# Altium PCB mySparky.PcbDoc
Units mil, origin at the board's own origin, x right, y up, seen from the top; angles counter-clockwise.
Board outline 1062.99 x 866.14 mil, 4 copper layers (Top Layer, GND, PWR, Bottom Layer), stack 30.634 mil thick; 48 components, 48 nets, 231 pads, 95 vias.
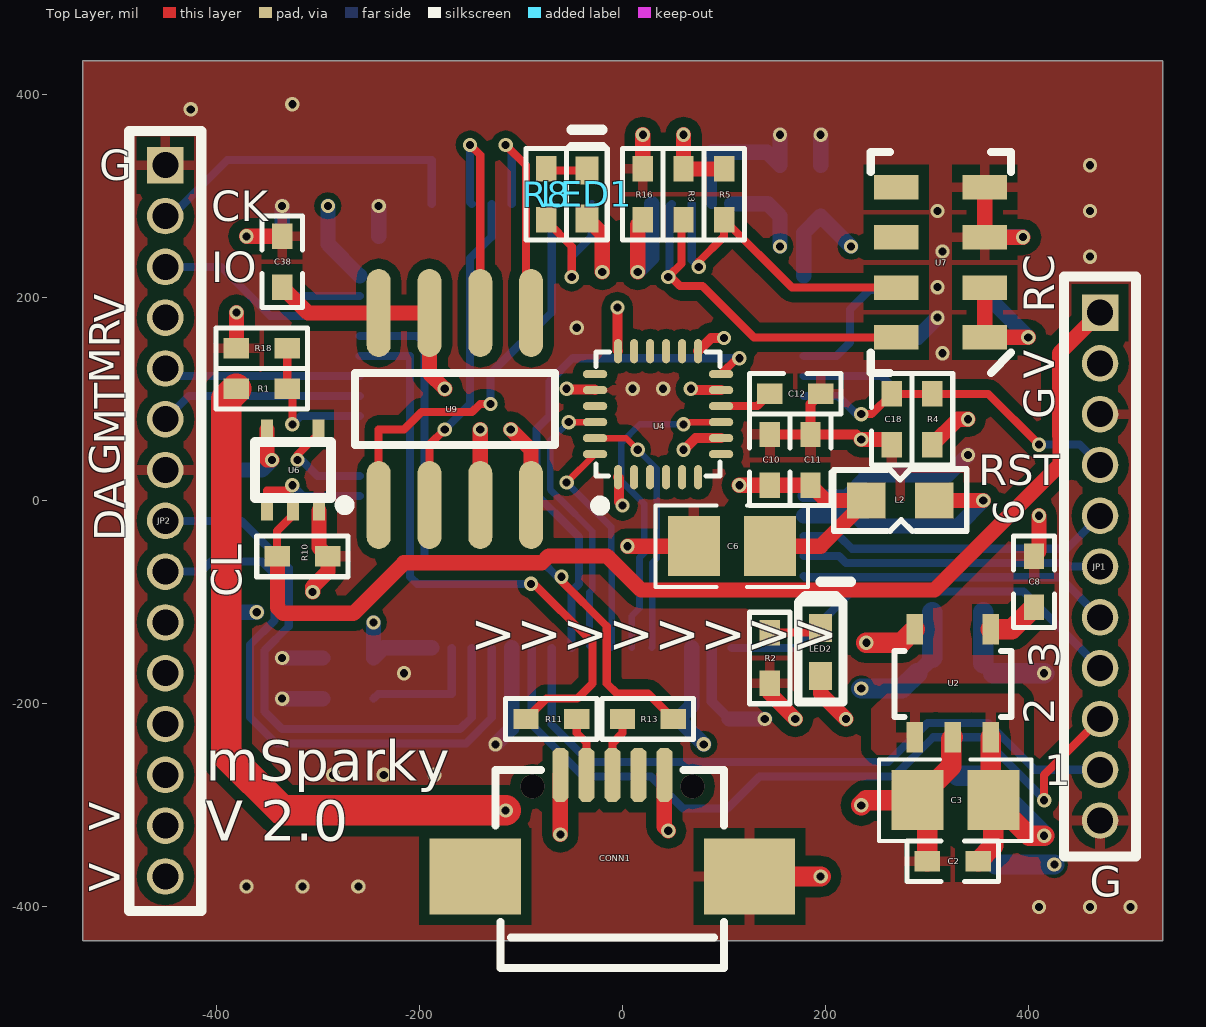
[diagram p0: Top Layer view]
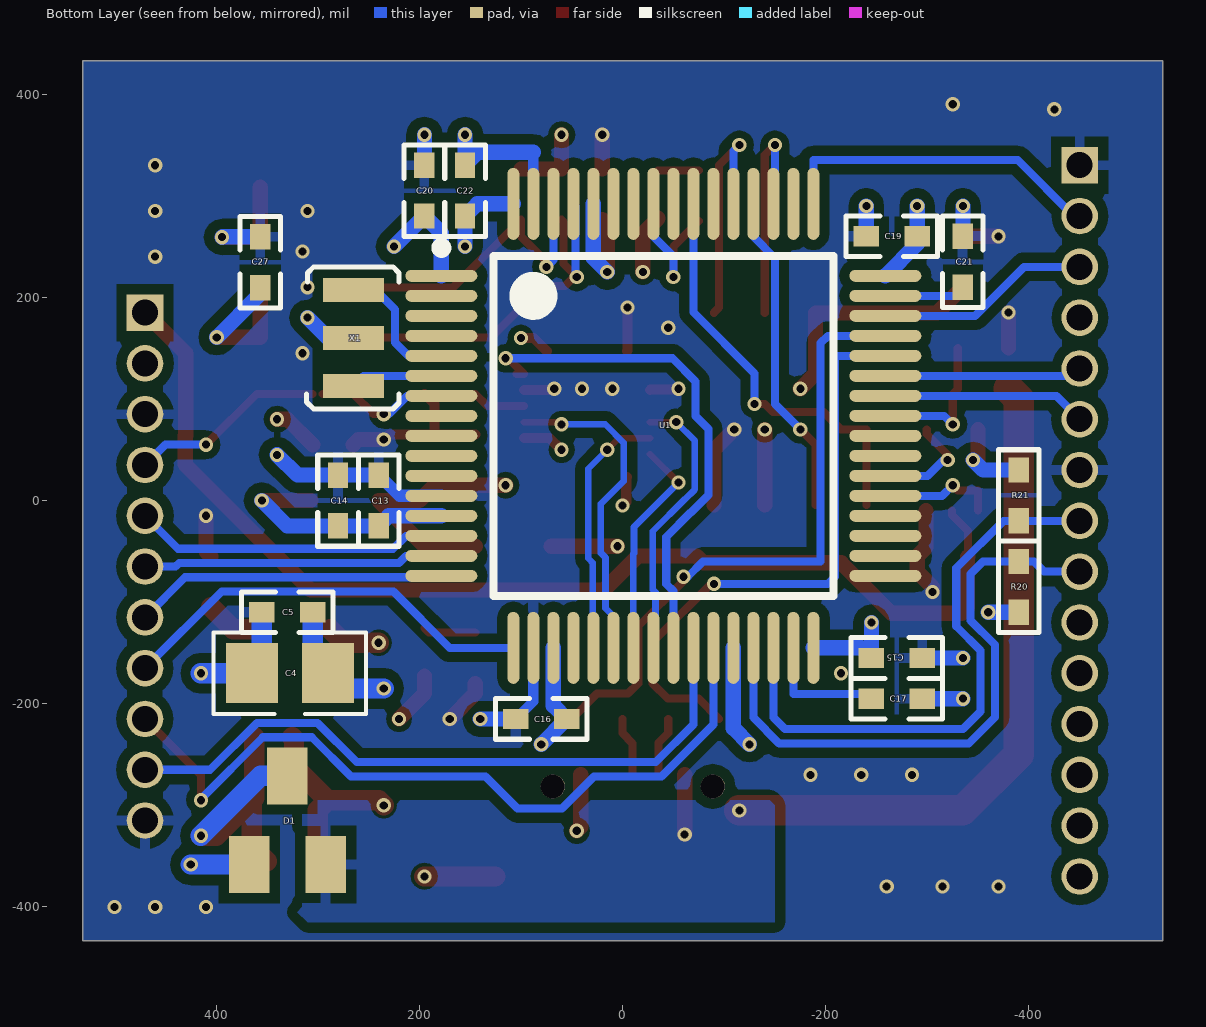
[diagram p1: Bottom Layer view, seen from below]
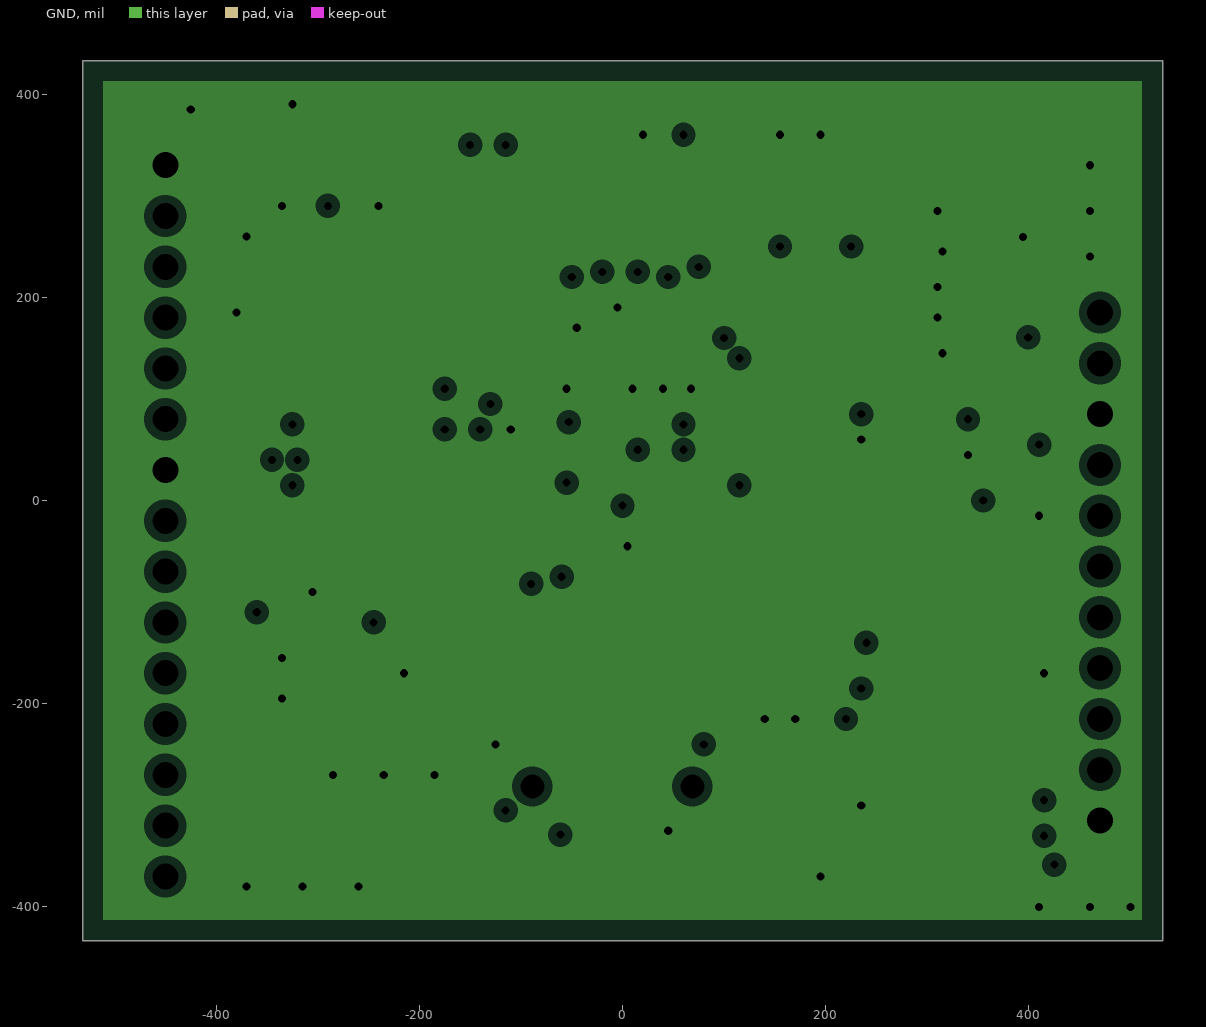
[diagram p2: GND, clearances drawn from the general rule]
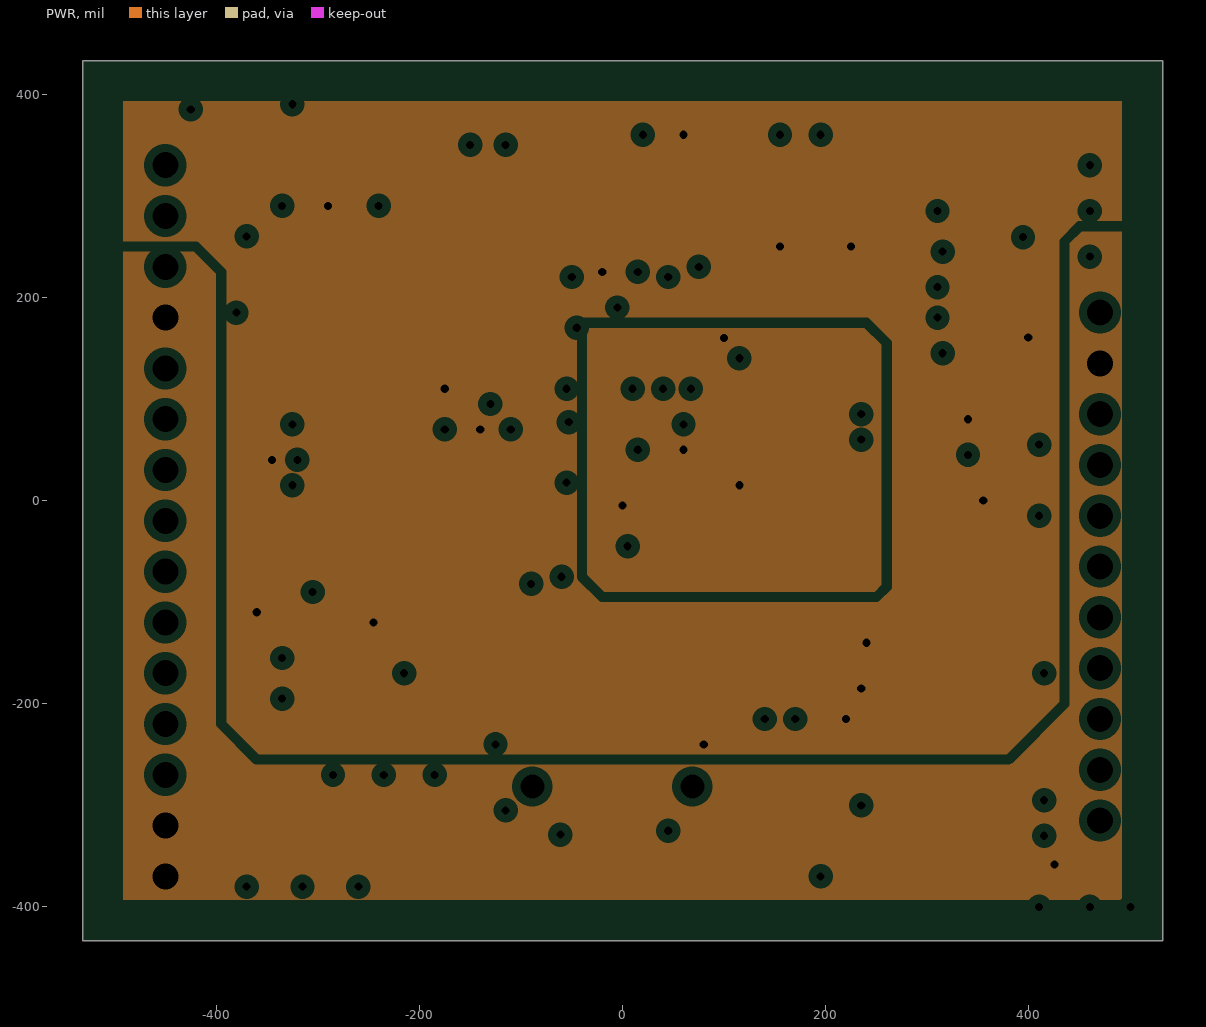
[diagram p3: PWR, clearances drawn from the general rule]

## Layer stack, top to bottom
Top Solder: solder mask 0.4, Solder Resist, Dk 3.5
Top Layer: signal copper 1.4
Dielectric 1: core 10, FR-4, Dk 4.2
GND: plane copper 1.417, net GND
Dielectric 3: prepreg 5, Dk 4.2
PWR: plane copper 1.417, net (Multiple Nets)
Dielectric 2: core 10, Dk 4.2
Bottom Layer: signal copper 1.4
Bottom Solder: solder mask 0.4, Solder Resist, Dk 3.5

## Board outline
-531.5,-433.07 -531.5,433.07 531.5,433.07 531.5,-433.07

## Design rules (kind name [scope] priority, off if disabled: settings)
Clearance [All] p1: gap=6 ignorepadtopadclearanceinfootprint=FALSE except(10: Arc-Fill Arc-Poly Arc-Region Track-Fill Track-Poly Track-Region SMDPad-Fill SMDPad-Poly SMDPad-Region THPad-Fill THPad-Poly THPad-Region Fill-Fill Fill-Poly Fill-Region Poly-Poly Poly-Region Region-Region)
DiffPairsRouting [All] p1: maxlimit=10 minlimit=6 mostfreqgap=6 toplayer_minwidth=6 toplayer_maxwidth=12 toplayer_prefwidth=6 bottomlayer_minwidth=6 bottomlayer_maxwidth=12 bottomlayer_prefwidth=6 maxuncoupledlength=500
PlaneClearance [All] p1: clearance=8
PlaneConnect [All] p1: pad.planeconnectstyle=Relief pad.reliefexpansion=10 pad.reliefentries=4 pad.reliefconductorwidth=6 pad.reliefairgap=8 via.planeconnectstyle=Direct via.reliefexpansion=20 via.reliefentries=4 via.reliefconductorwidth=10 via.reliefairgap=10
PolygonConnect [All] p1: thpad.connectstyle=Relief thpad.reliefconductorwidth=10 thpad.reliefentries=4 thpad.polygonreliefangle="90 Angle" thpad.airgapwidth=10 smdpad.connectstyle=Relief smdpad.reliefconductorwidth=10 smdpad.reliefentries=4 smdpad.polygonreliefangle="90 Angle" smdpad.airgapwidth=10 via.connectstyle=Direct via.reliefconductorwidth=10 via.reliefentries=4 via.polygonreliefangle="90 Angle" via.airgapwidth=10
RoomDefinition IMU [InComponentClass('IMU')] p1: confinementstyle=ConfineIn formatcopy=TRUE lockcomponents=FALSE outline -3880,-3030 -1880,-3030 -1880,-2030 -3880,-2030
RoomDefinition connector [InComponentClass('connector')] p2: confinementstyle=ConfineIn formatcopy=TRUE lockcomponents=FALSE outline -3880,-3030 -1880,-3030 -1880,-2030 -3880,-2030
RoutingVias [All] p1: holewidth=8 width=14 viastyle="Through Hole" minholewidth=8 minwidth=14 maxholewidth=8 maxwidth=14
SolderMaskExpansion [All] p1: expansion=2.5
UnRoutedNet [All] p1: checkbadconnections=TRUE
Width PWR [InNetClass('PWR')] p1: maxlimit=30 minlimit=10 preferedwidth=15
Width [All] p2: maxlimit=30 minlimit=6 preferedwidth=6.5
26 further rules are at their usual default settings.

## Classes and differential pairs
component class mcu: C2 C3 C4 C5 C6 C8 C13 C14 C15 C16 C17 C18 C19 C20 C21 C22 C27 C38 CONN1 D1 L2 LED1 LED2 R1 R2 R3 R4 R5 R8 R10 R11 R13 R16 R18 R20 R21 U1 U2 U6 U7 U9 X1
component class IMU: C10 C11 C12 U4
component class connector: JP1 JP2

## Components (designator, comment, footprint, x,y, rotation, side; value= is the part's Value field where it differs from the comment)
C2 "10nF" 0402C 325,-355 r0 top
C3 "10uF" 0805-1 327.6,-295 r0 top
C4 "10uF" 0805-1 327.4,-170 r180 bottom
C5 "10nF" 0402C 330,-110 r180 bottom
C6 "10uF" 0805-1 107.6,-45 r0 top
C8 "10nF" 0402C 405,-80 r270 top
C10 "10nF" 0402C 145,40 r90 top
C11 "100nF" 0402C 185,40 r90 top
C12 "100nF" 0402C 170,105 r180 top
C13 "10nF" 0402C 240,0 r90 bottom
C14 "100nF" 0402C 280,0 r90 bottom
C15 "100nF" 0402C -270,-155 r0 bottom
C16 "100nF" 0402C 80,-215 r0 bottom
C17 "2.2uF" 0402C -270,-195 r0 bottom
C18 "100nF" 0402C 265,80 r90 top
C19 "100nF" 0402C -265,260 r180 bottom
C20 "100nF" 0402C 195,305 r270 bottom
C21 "2.2uF" 0402C -335,235 r90 bottom
C22 "100nF" 0402C 155,305 r90 bottom
C27 "100nF" 0402C 356.61,234.61 r270 bottom
C38 "100nF" 0402C -335,235 r90 top
CONN1 "USB" USB_MIC_h -10,-370 r0 top locked
D1 "BAT54C" SOT23 330,-315 r180 bottom
JP1 "pad" 1.27*11 470,-65 r0 top
JP2 "pad" 1.27*15 -450,-20 r0 top
L2 "1uH" L0603 278.87,0 r180 top
LED1 "LED-B" "0402LED B" -35,301.38 r90 top
LED2 "LED_GREEN_PWR" "0402LED G" 195,-149.17 r90 top
R1 "10K" 0402R -355,110 r0 top
R2 "330R" 0402R 145,-155 r270 top
R3 "10K" 0402R 60,301.38 r90 top
R4 "10K" 0402R 305,80 r270 top
R5 "10K" 0402R 100,301.38 r90 top
R8 "330R" 0402R -75,301.38 r90 top
R10 "10K" 0402R -315,-55 r180 top
R11 "22R" 0402R -70,-215 r0 top
R13 "22R" 0402R 25,-215 r180 top
R16 "10K" 0402R 20,301.38 r90 top
R18 "10K" 0402R -355,150 r0 top
R20 "10K" 0402R -390,-85 r90 bottom
R21 "10K" 0402R -390,5 r270 bottom
U1 "STM32F405RGT6" STM-LQFP64_N -40.16,73.5 r180 bottom
U2 "LP2992-3.3" SOT-23-5L 325,-180 r90 top
U4 "MPU9250" QFN24-0.4 35,85 r90 top
U6 "XOR" SC70-5 -324.41,30 r0 top
U7 "MS5611" MS5611-01BA 313.31,234.61 r180 top
U9 "Flash 16Mbits" SO8_N -165,90 r90 top
X1 "8MHz" XTAL3215 265,160 r90 bottom

## Footprints (in the part's own frame and the unit in brackets; to place one, negate y for a bottom-side part, rotate by r counter-clockwise, add the part's x,y. Pads: shape width x height; smd on the part's side, far side on the other; paste and mask are expansions set on the pad)
1.27*11 [mil]
  rect 36x36 hole 25.59 mask+1.18: 1(0,250)
  round 36 hole 25.59 mask+1.18: 2(0,200) 3(0,150) 4(0,100) 5(0,50) 6(0,0) 7(0,-50) 8(0,-100) 9(0,-150) 10(0,-200) 11(0,-250)
  silkscreen extent -35,-285 35,285
1.27*15 [mil]
  rect 36x36 hole 25.59 mask+1.18: 1(0,350)
  round 36 hole 25.59 mask+1.18: 2(0,300) 3(0,250) 4(0,200) 5(0,150) 6(0,100) 7(0,50) 8(0,0) 9(0,-50) 10(0,-100) 11(0,-150) 12(0,-200) 13(0,-250) 14(0,-300) 15(0,-350)
  silkscreen extent -35,-384 35,384
0402C [mil]
  rect 25x20 smd: 1(-25,0) 2(25,0)
  silkscreen extent -45,-20 45,20
"0402LED B" [mm]
  rect 0.7x0.58 smd: 1(-0.6,0) 2(0.6,0)
  silkscreen extent -1.14,-0.51 1.24,0.51, body extent -0.5,-0.25 0.51,0.25, height 0.45
"0402LED G" [mm]
  rect 0.7x0.58 smd: 1(-0.6,0) 2(0.6,0)
  silkscreen extent -1.24,-0.56 1.42,0.56, body extent -0.5,-0.25 0.51,0.25, height 0.45
0402R [mil]
  rect 25x20 smd: 1(-25,0) 2(25,0)
  silkscreen extent -45,-20 45,20
0805-1 [mm] "贴片带丝印"
  rect 1.3x1.5 smd: 1(-0.95,0) 2(0.95,0)
  silkscreen extent -1.91,-1.02 1.91,1.02, body extent -1.14,-0.51 1.14,0.51, height 1
L0603 [mil]
  rect 38x35 smd: 1(-28,0) 2(38.87,0)
  silkscreen extent -60,-31 71,30, body extent -24,-15 36,15, height 20
MS5611-01BA [mil] "MS5611-01BA"
  rect 44x24 smd: 1(-43.31,74) 2(-43.31,25) 3(-43.31,-24.61) 4(-43.31,-73.82) 5(44,-73.82) 6(44,-24.61) 7(44,25) 8(44,74)
  silkscreen extent -69,-108 69,109, body extent -59,-98 59,99, height 39
QFN24-0.4 [mil]
  oval 24x8 smd: 1(-62.01,39.37) 2(-62.01,23.62) 3(-62.01,7.87) 4(-62.01,-7.87) 5(-62.01,-23.62) 6(-62.01,-39.37) 13(62.01,-39.37) 14(62.01,-23.62) 15(62.01,-7.87) 16(62.01,7.87) 17(62.01,23.62) 18(62.01,39.37)
  oval 8x24 smd: 7(-39.37,-62.01) 8(-23.62,-62.01) 9(-7.87,-62.01) 10(7.87,-62.01) 11(23.62,-62.01) 12(39.37,-62.01) 19(39.37,62.01) 20(23.62,62.01) 21(7.87,62.01) 22(-7.87,62.01) 23(-23.62,62.01) 24(-39.37,62.01)
  silkscreen extent -95,-61 61,62
SC70-5 [mm]
  rect 0.3x0.5 smd: 1(-0.65,-1.016) 2(0,-1.016) 3(0.65,-1.016) 4(0.635,1.016) 5(-0.65,1.016)
  round 0.3 on Top Overlay: 6(-0.635,-0.381)
  silkscreen extent -0.95,-0.7 0.95,0.7
SO8_N [mm] "SOIC, 8-Leads, Body 4.9x3.9mm, Pitch 1.27mm, IPC Medium Density"
  oval 2.2x0.6 smd: 1(-2.4,1.905) 2(-2.4,0.635) 3(-2.4,-0.635) 4(-2.4,-1.905) 5(2.4,-1.905) 6(2.4,-0.635) 7(2.4,0.635) 8(2.4,1.905)
  silkscreen extent -2.52,-2.5 0.9,2.88, body extent -2,-2.5 2,2.5, height 1.75
SOT23 [mil] "SOT23"
  rect 40x56 smd: 1(-37.4,-43.31) 2(38,-43.31) 3(0,44)
  body extent -57,-50 57,60, height 51
SOT-23-5L [mm]
  rect 0.762x0.406 smd: 1(-1.35,0.95) 2(-1.35,0) 3(-1.35,-0.95) 4(1.35,-0.95) 5(1.35,0.95)
  round 0.3 on Top Overlay: 7(-0.525,1.175)
  silkscreen extent -0.84,-1.46 0.81,1.46
STM-LQFP64_N [mm] "Thin QFP, 64-Leads, Body 10x10mm, Pitch 0.5mm, IPC Medium Density"
  oval 1.8x0.3 smd: 1(-5.55,3.75) 2(-5.55,3.25) 3(-5.55,2.75) 4(-5.55,2.25) 5(-5.55,1.75) 6(-5.55,1.25) 7(-5.55,0.75) 8(-5.55,0.25) 9(-5.55,-0.25) 10(-5.55,-0.75) 11(-5.55,-1.25) 12(-5.55,-1.75) 13(-5.55,-2.25) 14(-5.55,-2.75) 15(-5.55,-3.25) 16(-5.55,-3.75) 33(5.55,-3.75) 34(5.55,-3.25) 35(5.55,-2.75) 36(5.55,-2.25) 37(5.55,-1.75) 38(5.55,-1.25) 39(5.55,-0.75) 40(5.55,-0.25) 41(5.55,0.25) 42(5.55,0.75) 43(5.55,1.25) 44(5.55,1.75) 45(5.55,2.25) 46(5.55,2.75) 47(5.55,3.25) 48(5.55,3.75)
  oval 0.3x1.8 smd: 17(-3.75,-5.55) 18(-3.25,-5.55) 19(-2.75,-5.55) 20(-2.25,-5.55) 21(-1.75,-5.55) 22(-1.25,-5.55) 23(-0.75,-5.55) 24(-0.25,-5.55) 25(0.25,-5.55) 26(0.75,-5.55) 27(1.25,-5.55) 28(1.75,-5.55) 29(2.25,-5.55) 30(2.75,-5.55) 31(3.25,-5.55) 32(3.75,-5.55) 49(3.75,5.55) 50(3.25,5.55) 51(2.75,5.55) 52(2.25,5.55) 53(1.75,5.55) 54(1.25,5.55) 55(0.75,5.55) 56(0.25,5.55) 57(-0.25,5.55) 58(-0.75,5.55) 59(-1.25,5.55) 60(-1.75,5.55) 61(-2.25,5.55) 62(-2.75,5.55) 63(-3.25,5.55) 64(-3.75,5.55)
  silkscreen extent -5.68,-4.25 4.25,4.57, body extent -5,-5 5,5, height 1.6
USB_MIC_h [mm]
  oct 0.4x1.35 smd: 1(-1.3,2.54) 2(-0.65,2.54) 3(0,2.54) 4(0.65,2.54) 5(1.3,2.54)
  rect 2.286x1.9 smd: 6(3.429,0) 7(-3.429,0)
  round 0.6 hole 0.6 mask+0: 44(2,2.25) 55(-2,2.25)
  silkscreen extent -2.92,-2.29 2.79,2.67
XTAL3215 [mm]
  rect 0.6x1.524 smd: 1(-1.2,0) 2(0,0) 3(1.2,0)
  silkscreen extent -1.78,-1.14 1.78,1.17

## Part data
C2 C3 C4 C5 C6 C8 C10 C11 C12 C13 C14 C15 C16 C17 C18 C19 C20 C21 C22 C27 C38: library part cap, "贴片电阻"
CONN1: library part USB-MIC, "USB Micro USB R/A Type B"
D1: "Dual Diode Command Cathode BAT54C"
JP1: library part 1.27*11, "11pin pad"
JP2: library part 1.27*15, "15pin pad"
L2: library part inducer, "贴片电感"
LED1: "LED-BLUE"
LED2: library part LED_GREEN, "绿色led"
R1 R2 R3 R4 R5 R8 R10 R11 R13 R16 R18 R20 R21: library part Res-0402, "贴片电阻"
U1: "ARM Cortex-M4 32-bit MCU+FPU, 210 DMIPS, 1024 kB Flash, 192 kB Internal RAM, 51 I/Os, 64-pin LQFP, -40 to 85 degC, Tray", I/Os (High Current)=51, Manufacturer=STMicroelectronics, Operating Frequency(F) (Processor speed) (MHz)=168, Supplier Part Number 1=497-11767-ND, Supply Voltage(Vcc) max (V)=3.6, Supply Voltage(Vcc) min (V)=1.8, ComponentLink1Description="Manufacturer URL", ComponentLink1URL=http://www.st.com/web/en/home.html, ComponentLink2Description=Datasheet, ComponentLink2URL=http://www.st.com/st-web-ui/static/active/en/resource/technical/document/datasheet/DM00037051.pdf, ComponentLink3Description="Package Specification", ComponentLink3URL=http://www.st.com/st-web-ui/static/active/en/resource/technical/document/datasheet/DM00037051.pdf, Core="ARM Cortex-M4", D/A Converter=2x12-bit, DatasheetVersion="Rev. 4", FLASH Size (Prog) (kB)=1024, Internal RAM Size (kB)=192, Mounting Technology="Surface Mount", PackageDescription="64-Pin Low Profile Quad Flat Package, 10 x 10 mm Body, 0.5 mm Pitch", PackageReference=LQFP64, PackageVersion="Rev. 4, 06/2013", Packing=Tray, PartNumber=STM32F405RGT6, Supplier 1=Digi-Key, Supplier 2=Farnell, Supplier 3=Newark, Supplier 4=Mouser, Supplier Part Number 2=2064363, Supplier Part Number 3=73T2329, Supplier Part Number 4=511-STM32F405RGT6
U2: "LP2992IM5-3.3/NOPBCT-ND"
U6: "XOR Gate SN74LVC1G86DCKR"
U7: "MS561101BA03"
U9: library part Flash, "16Mbit SPI Flash Memory"
X1: library part XTAL-3215

## Via types
v1: diameter 14, hole 8, Top Layer to Bottom Layer, 95 vias

## Nets (pads, with @x,y where several pads share a name; then routed paths per layer and width w, separated by ;. In a path a pad name is that pad's centre, name@x,y a point inside that pad or via, vN(x,y) a via of type N, cw(c..) or ccw(c..) an arc to the next point about the centre after c; other vN are vias at no path point)
CMD: U1.38 U6.4 | length 106.4
  Top Layer w8: v1(-320,40) -320,45 -299.41,65.59 U6.4
  Bottom Layer w8: v1(-320,40) -316.02,40 -300.32,24.29 U1.38
FCS: U1.55 U9.1 | length 416.8
  Top Layer w8: U9.1 -240,70 -215,70 -198,87 -148,87 -140,95 v1(-130,95)
  Bottom Layer w8: v1(-130,95) -130,125 -69.68,185.32 U1.55
FRX_SDA: JP2.8 R21.2 U1.30 | length 576.2
  Bottom Layer w8: JP2.8 R21.2 -375,-20 -328.5,-66.5 -328.5,-123.75 -352.5,-147.75 -352.5,-207.5 -335,-225 -160,-225 -148.43,-213.43 U1.30
FSCK: U1.51 U9.6 | length 228.3
  Top Layer w8: v1(-150,350) -140,340 U9.6
  Bottom Layer w8: v1(-150,350) -150,293.58 U1.51
FSI: U1.53 U9.5 | length 236.3
  Top Layer w8: v1(-115,350) -95,330 -95,190 -90,185 U9.5
  Bottom Layer w8: v1(-115,350) -109.06,344.06 U1.53
FSO: U1.52 U9.2 | length 321.9
  Top Layer w8: U9.2 -190,55 v1(-175,70)
  Bottom Layer w8: v1(-175,70) -150,95 -150,238.41 -128.74,259.67 U1.52
FTX_SCL: JP2.9 R20.2 U1.29 | length 595.2
  Bottom Layer w8: JP2.9 -415,-70 -405,-60 R20.2 -354.8,-60 -342.5,-72.3 -342.5,-117.95 -366.5,-141.95 -366.5,-213.3 -340.8,-239 -154.2,-239 -128.74,-213.54 U1.29
GND: C2.1 C3.1 C4.1 C5.1 C6.1 C8.1 C10.2 C11.2 C12.1 C13.2 C14.2 C15.1 C16.2 C17.1 C18.1 C19.1 C20.1 C21.2 C22.2 C27.1 C38.2 CONN1.5 CONN1.6 JP1.3 JP1.11 JP2.1 JP2.7 R2.2 R10.1 R16.2 R18.1 U1.12 U1.18 U1.28 U1.63 U2.2 U4.11 U4.18 U4.20 U6.3 U7.3 U7.4 U9.4 X1.2 | length 2031
  Top Layer w10: v1(-55,110) -54.37,109.37 -27.76,109.37 U4.20 ; v1(-5,190) -5,147.64 U4.18 ; v1(67.24,110) 68.62,108.62 U4.11 ; C10.2 C11.2 ; C12.1 185,95 C11.2 ; v1(235,60) 230,65 C11.2
  Top Layer w15: R18.1 v1(-380,185) ; v1(-370,260) C38.2 ; v1(-305,-90) -305,-85 -290,-70 R10.1 -298.82,-46.18 U6.3 ; v1(-110,70) -90,50 U9.4 ; v1(5,-45) C6.1 ; R16.2 v1(20,360) ; CONN1.5 41.18,-321.18 v1(45,-325) ; R2.2 145,-190 v1(170,-215) ; v1(235,60) 260,60 C18.1 ; U7.4 U7.3 v1(394.21,259.21) ; C8.1 410,-50 v1(410,-15)
  Top Layer w20: CONN1.6 v1(195,-370) ; v1(235,-300) 240,-295 C3.1 ; C2.1 300,-304.8 C3.1 ; U2.2 323.41,-234.74 323.41,-261.79 C3.1
  Bottom Layer w10: U1.18 87.8,-197.8 C16.2 ; U1.63 87.8,342.8
  Bottom Layer w12: U1.12 219.61,4.61 C13.2 ; C4.1@355,-160.2 C4.1
  Bottom Layer w15: v1(-335,-195) C17.1 ; v1(-335,-155) C15.1 ; C21.2 v1(-335,290) ; C19.1 v1(-240,290) ; v1(-125,-240) -109.06,-224.06 U1.28 ; 87.8,342.8 142.2,342.8 C22.2 v1(155,360) ; C16.2 v1(140,-215) ; C20.1 v1(195,360) ; C13.2 C14.2 320,25 v1@340,45 ; X1.2 290,160 v1(310,180) ; C27.1 393.82,259.61 v1(394.21,259.21)
  Bottom Layer w20: C4.1@355,-160.2 C5.1 ; C4.1 v1(415,-170)
  other v1: 410,-400 460,-400 500,-400 -370,-380 -315,-380 -260,-380 -285,-270 -235,-270 -185,-270 -215,-170 340,44.91 10,110 40,110 315,145 -45,170 310,210 460,240 315,245 310,285 460,285 460,330 -425,385 -325,390
I2C_SCL: R3.1 U1.61 U7.8 | length 384.1
  Top Layer w8: v1(45,220) v1@46.41,221.41 ; R3.1 58,274.38 58,233 v1@46.41,221.41 ; U7.8 129.39,160.61 78.89,211.11 56.71,211.11 v1@46.41,221.41
  Bottom Layer w8: v1(45,220) 46.24,221.24 46.24,289.82 U1.61
I2C_SDA: R5.1 U1.62 U7.7 | length 318.6
  Top Layer w8: v1(75,230) 75,235 100,260 R5.1 166.77,209.61 U7.7
  Bottom Layer w8: U1.62 68.11,236.89 v1(75,230)
LED_HEART: R8.1 U1.57 | length 145.5
  Top Layer w8: R8.1@-75,275 -50,250 v1(-50,220)
  Bottom Layer w8: v1(-50,220) -50,239.99 -30.31,259.67 U1.57
MAIN_RX: JP2.5 U1.43 | length 194.4
  Bottom Layer w8: JP2.5 -442.72,122.72 U1.43
MAIN_TX: JP2.6 U1.42 | length 200.9
  Bottom Layer w8: JP2.6 -426.97,103.03 U1.42
MCU_IN: U1.37 U6.1 | length 117.7
  Top Layer w8: U6.1 -350,10 -330,10 v1(-325,15)
  Bottom Layer w8: v1(-325,15) -314.61,4.61 U1.37
MPU_CS: U1.24 U4.22 | length 275
  Top Layer w6.5: v1(-52.87,77.13) U4.22
  Bottom Layer w6.5: v1(-52.87,77.13) -71.25,58.75 -71.25,10.91 -61.73,1.39 -61.39,1.39 -29.75,-30.25 -29.75,-87.53 -32.5,-90.28 -32.5,-142.81 U1.24
MPU_IRQ: U1.25 U4.12 | length 515.9
  Top Layer w8: U4.12@104.37,124.37 U4.12 112.64,140 v1(115,140)
  Bottom Layer w8: U1.25@-50.1,-145 -50.1,-89.14 -43,-82.04 -43,-35.74 -66.88,-11.86 -67.22,-11.86 -84.5,5.42 -84.5,70.5 -72,83 -72,117.04 -49.04,140 v1(115,140)
MPU_SCK: U1.21 U4.23 | length 251.6
  Top Layer w6.5: U4.23 3.62,61.38 v1(15,50)
  Bottom Layer w6.5: v1(15,50) 33.75,31.25 33.75,-56.91 29.25,-61.41 29.25,-144.49 U1.21
MPU_SDI: U1.23 U4.24 | length 220.6
  Top Layer w6.5: v1(-55,17.64) U4.24
  Bottom Layer w6.5: v1(-55,17.64) -11.25,-26.11 -11.25,-51.73 -10.63,-52.35 U1.23
MPU_SDO: U1.22 U4.9 | length 322.8
  Top Layer w6.5: v1(60,75) 62.13,77.13 U4.9
  Bottom Layer w6.5: U1.22 9.06,-113.72 16.75,-106.03 16.75,-56.23 21.25,-51.73 21.25,-3.27 -1.25,19.23 -1.25,56.73 17.02,75 v1(60,75)
NetC8_2: C8.2 U2.4 | length 51.6
  Top Layer w20: U2.4 383.15,-126.85 C8.2
NetC12_2: C12.2 U4.10 | length 53
  Top Layer w8: U4.10 132.87,92.87 C12.2
NetC17_2: C17.2 U1.31 | length 124.2
  Bottom Layer w8: C17.2 -240.43,-190.43 -168.11,-190.43 U1.31
NetC21_1: C21.1 U1.47 | length 79.9
  Bottom Layer w8: C21.1 -326.46,201.46 U1.47
NetCONN1_2: CONN1.2 R11.2 | length 58.9
  Top Layer w8: R11.2 -45,-229 -35.59,-238.41 CONN1.2
NetCONN1_3: CONN1.3 R13.2 | length 59.1
  Top Layer w8: CONN1.3 -10,-239 0,-229 R13.2
NetLED1_2: LED1.2 R8.2 | length 40
  Top Layer w8: R8.2@-75,325 LED1.2
NetLED2_2: LED2.2 R2.1 | length 51.8
  Top Layer w8: R2.1 190.55,-130 LED2.2
NetR1_2: R1.2 R18.2 U1.41 | length 146.9
  Top Layer w8: R18.2 R1.2 -325,105 v1(-325,75)
  Bottom Layer w8: v1(-325,75) -316.65,83.35 U1.41
NetR16_1: R16.1 U1.60 | length 126.1
  Top Layer w15: v1(15,225) 15,271.38 R16.1
  Bottom Layer w15: v1(15,225) 28.74,238.74 U1.60
NetU1_5: U1.5 X1.3 | length 132.5
  Bottom Layer w8: U1.5 210.68,142.4 223.78,155.5 223.78,187.83 243.19,207.24 X1.3
NetU1_6: U1.6 X1.1 | length 90.8
  Bottom Layer w8: U1.6 255.04,122.72 X1.1
NRST: C18.2 JP1.4 R4.1 U1.7 | length 326.4
  Top Layer w8: v1(235,85) 245,85 C18.2 R4.1@295,105 ; R4.1 360,105 v1(410,55)
  Bottom Layer w8: U1.7 211.97,103.03 230,85 v1(235,85) ; v1(410,55) 450,55 JP1.4
RC_IN: JP1.1 R10.2 U6.2 | length 1129.2
  Top Layer w8: R10.2 -340,-29.89 -324.41,-14.3 U6.2
  Top Layer w15: R10.2 -339.5,-55.5 -339.5,-105.5 -334,-111 -264.99,-111 -215.29,-61.3 -79.52,-61.3 -72.72,-54.5 -15.2,-54.5 18.33,-88.03 306.97,-88.03 430.5,35.5 430.5,63.49 430,63.99 430,145 JP1.1
SERVO1: JP1.10 U1.26 | length 665.5
  Bottom Layer w8: U1.26 -69.68,-220.52 -32.7,-257.5 261.56,-257.5 300.06,-219 359.94,-219 405.94,-265 JP1.10
SERVO2: JP1.9 U1.27 | length 772.4
  Top Layer w8: v1(415,-295) 415,-270 JP1.9
  Bottom Layer w8: U1.27 -89.37,-220.63 -38.5,-271.5 27.98,-271.5 59.71,-303.23 103.23,-303.23 134.96,-271.5 267.36,-271.5 305.86,-233 354.14,-233 415,-293.86 v1(415,-295)
SERVO3: JP1.8 U1.17 | length 416.8
  Bottom Layer w8: U1.17 170,-145 225.5,-89.5 394.5,-89.5 JP1.8
SERVO4: JP1.7 U1.16 | length 308.6
  Bottom Layer w8: U1.16 179.71,-75.5 430.5,-75.5 JP1.7
SERVO5: JP1.6 U1.15 | length 296
  Bottom Layer w8: U1.15 213.01,-54.45 220.06,-61.5 436.3,-61.5 439.8,-65 JP1.6
SERVO6: JP1.5 U1.14 | length 310.4
  Bottom Layer w8: U1.14 213.12,-34.76 225.86,-47.5 437.5,-47.5 JP1.5
SWDCLK: JP2.2 U1.49 | length 328
  Bottom Layer w8: JP2.2 -444,280 -389,335 -187.8,335 U1.49
SWDIO: JP2.3 U1.46 | length 211.3
  Bottom Layer w8: JP2.3 -395,230 -346.77,181.77 U1.46
USB_DN: R11.1 U1.44 | length 598
  Top Layer w8: R11.1 -75,-195 -44.5,-195 -29.5,-180 -29.5,-139.54 -90,-79.04 v1(-90,-82.02)
  Bottom Layer w8: U1.44 -209,142.4 -209,-75 -201.98,-82.02 v1(-90,-82.02)
USB_DP: R13.1 U1.45 | length 626.2
  Top Layer w8: v1(-60,-75) -60,-79.2 -15.5,-123.7 -15.5,-180 -5.5,-190 25,-190 R13.1
  Bottom Layer w8: U1.45 -202.09,162.09 -195,155 -195,-60 -79.2,-60 -64.2,-75 v1(-60,-75)
USBPWR: CONN1.1 D1.2 R1.1 | length 720.7
  Top Layer w15: v1(-61.18,-328.82) CONN1.1
  Top Layer w30: R1.1 -390,100 -390,-250 -335,-305 v1(-115,-305)
VCC: C4.2 C5.2 C13.1 C14.1 C15.2 C16.1 C19.2 C20.2 C22.1 C27.2 C38.1 L2.1 LED1.1 LED2.1 R3.2 R4.2 R5.2 R20.1 R21.1 U1.1 U1.13 U1.19 U1.32 U1.48 U1.64 U2.5 U6.5 U7.1 U7.2 U9.3 U9.7 U9.8 | length 1713.3
  Top Layer w15: U6.5 -350,40 v1(-345,40) ; C38.1 -309.49,184.49 U9.8 U9.7 -190,125 v1(-175,110) ; U9.3 v1(-140,70) ; LED1.1 -20,262.76 v1(-20,225) ; v1(60,360) R3.2 R5.2 ; LED2.1 195,-190 v1(220,-215) ; R4.2 330,80 v1(340,80) ; L2.1 v1(355,0) ; U7.2 U7.1 v1(399.39,160.61)
  Top Layer w20: v1(240,-140) 274.45,-140 U2.5
  Bottom Layer w15: R20.1 v1(-360,-110) ; R21.1 -355,30 v1(-345,40) ; v1(-290,290) C19.2 -290,252.48 U1.48 ; v1(-245,-120) C15.2 -235,-145 U1.32 ; U1.19 68.11,-201.89 C16.1 v1(80,-240) ; U1.64 142.99,292.01 C22.1 v1(155,250) ; U1.13 230.08,-15.08 C13.1 C14.1 330,-25 v1(355,0) ; U1.1 178.35,263.35 C20.2 v1(225,250) ; C4.2 C4.2@305,-155 ; C27.2 356.61,203.39 v1(399.39,160.61)
  Bottom Layer w20: v1(235,-185) 275,-185 C4.2 ; C4.2@305,-155 C5.2
VCC_BAT: D1.1 JP1.2 JP2.4 JP2.14 JP2.15 | length 57.6
  Bottom Layer w20: D1.1 v1(425,-358.31)
VCCA: C6.2 C10.1 C11.1 L2.2 U4.1 U4.8 U4.13 | length 347.4
  Top Layer w10: U4.1 -3.62,22.24 -3.62,-1.38 v1(0,-5) ; v1(60,50) 60.46,50 71.83,61.38 U4.8 ; U4.13 87.36,160 v1(100,160)
  Top Layer w15: v1(115,15) C10.1 C11.1 200,0 L2.2 195,-45 C6.2
VIN: C2.2 C3.2 D1.3 U2.1 U2.3 | length 303.1
  Top Layer w20: C2.2 365,-340 C3.2 ; U2.3 362.4,-292.4 C3.2 ; v1(415,-330) 400,-330 C3.2
  Bottom Layer w20: D1.3 356,-271 v1(415,-330)
pads on no net: CONN1.4 CONN1.7 CONN1.44 CONN1.55 JP2.10 JP2.11 JP2.12 JP2.13 U1.2 U1.3 U1.4 U1.8 U1.9 U1.10 U1.11 U1.20 U1.33 U1.34 U1.35 U1.36 U1.39 U1.40 U1.50 U1.54 U1.56 U1.58 U1.59 U2.7 U4.2 U4.3 U4.4 U4.5 U4.6 U4.7 U4.14 U4.15 U4.16 U4.17 U4.19 U4.21 U6.6 U7.5 U7.6

## Polygon pours and split planes (outlines as drawn)
GND on Top Layer "Top Layer-No Net" (solid, remove dead copper, pour order 9): -531.5,-433.07 -531.5,433.07 531.5,433.07 531.5,-433.07
VIN on Top Layer "Top Layer-No Net" (solid, pour order 6): 245,-245 245,-205 260,-190 390,-190 395,-195 395,-250 250,-250
GND on Bottom Layer "Top Layer-No Net" (solid, remove dead copper, pour order 10): -531.5,-433.07 531.5,-433.07 531.5,433.07 -531.5,433.07
USBPWR on Bottom Layer "Top Layer-No Net" (solid, pour order 8): 315,-295 315,-400 320,-405 310,-415 -150,-415 -150,-300 -145,-295
GND on GND (split plane): 511.4,-412.97 -511.4,-412.97 -511.4,412.97 511.4,412.97
VCCA on PWR (split plane): 254.9,152.89 254.9,-82.89 247.89,-89.9 -17.89,-89.9 -34.9,-72.89 -34.9,169.9 237.89,169.9
VCC_BAT on PWR (split plane): 491.41,-392.99 -491.41,-392.99 -491.41,244.9 -422.11,244.9 -400.1,222.89 -400.1,-220 -399.71,-221.95 -398.6,-223.6 -363.6,-258.6 -361.95,-259.71 -360,-260.1 380,-260.1 381.95,-259.71 383.6,-258.6 438.6,-203.6 439.71,-201.95 440.1,-200 440.1,252.89 452.11,264.9 491.41,264.9
VCC on PWR (split plane): 491.41,275.1 450,275.1 448.05,274.71 446.4,273.6 431.4,258.6 430.29,256.95 429.9,255 429.9,-197.89 377.89,-249.9 -357.89,-249.9 -389.9,-217.89 -389.9,225 -390.29,226.95 -391.4,228.6 -416.4,253.6 -418.05,254.71 -420,255.1 -491.41,255.1 -491.41,392.99 491.41,392.99

## Other copper
Top Layer:
  pour cut-out: 165,-5 165,-90 320,-90 355,-55 355,0 145,0 140,-5
PWR (plane layer: these items are gaps in the copper):
  lines w10: -531.5,250 -420,250 -395,225 -395,-220 -360,-255 380,-255 435,-200 435,255 450,270 531.5,270 ; -40,-75 -20,-95 250,-95 260,-85 260,155 240,175 -40,175 -40,-75

## Silkscreen, mask and mechanical layers (free items; w line width, h text height)
Top Overlay:
  lines w10: -50,365 -20,365 ; 195,-80 225,-80
  text "G" at -515,315 h30
  text "CK" at -405,275 h30
  text "IO" at -405,215 h30
  text "RC" at 425,185 h30 r90
  text "V" at -490,175 h30 r90
  text "V" at 425,120 h30 r90
  text "MR" at -495,115 h30 r90
  text "G" at 425,80 h30 r90
  text "MT" at -490,55 h30 r90
  text "G" at -495,25 h30 r90
  text "RST" at 350,15 h30
  text "6" at 395,-25 h30 r90
  text "DA" at -490,-40 h30 r90
  text "CL" at -375,-95 h30 r90
  text ">>>>>>>>" at -150,-150 h39.37
  text "3" at 430,-165 h30 r90
  text "2" at 425,-220 h30 r90
  text "1" at 415,-280 h30
  text "V" at -495,-325 h30 r90
  text "mSparky / V 2.0" at -410,-335 h39.37
  text "V" at -495,-385 h30 r90
  text "G" at 460,-390 h30
Mechanical 1:
  the board outline again, w10
Drill Drawing:
  text ".Legend" at 710,-385 h30